# EAGLE board v3_dashbutton_2450 (EAGLE 9.1.3)
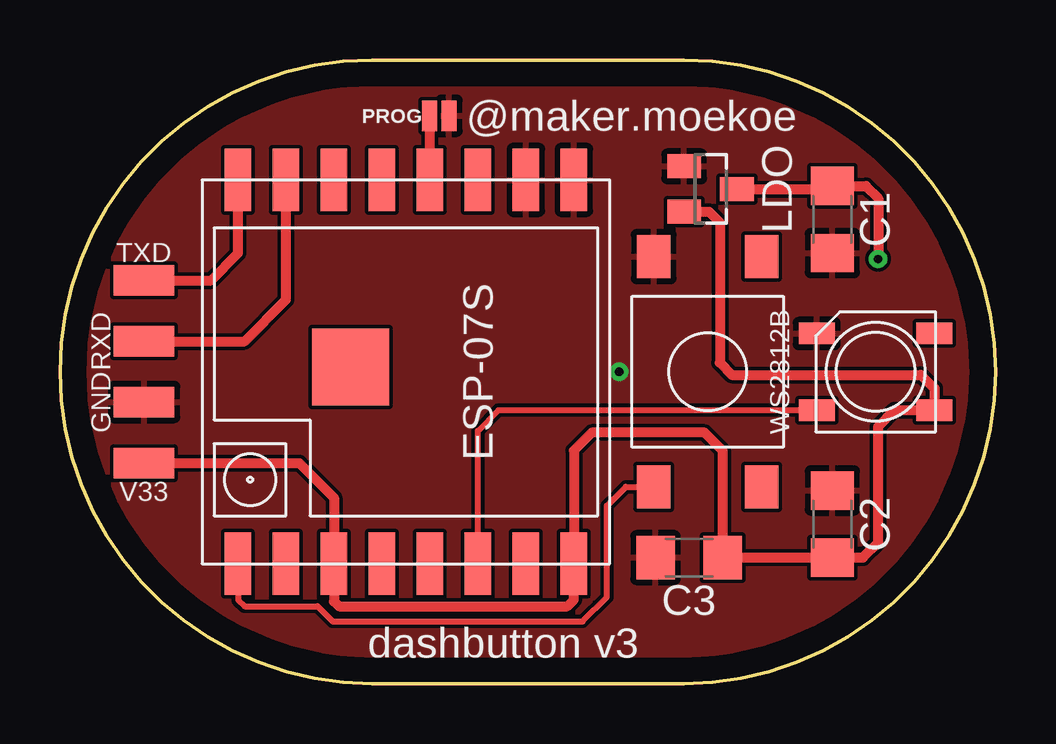
[diagram p0: board, top side]
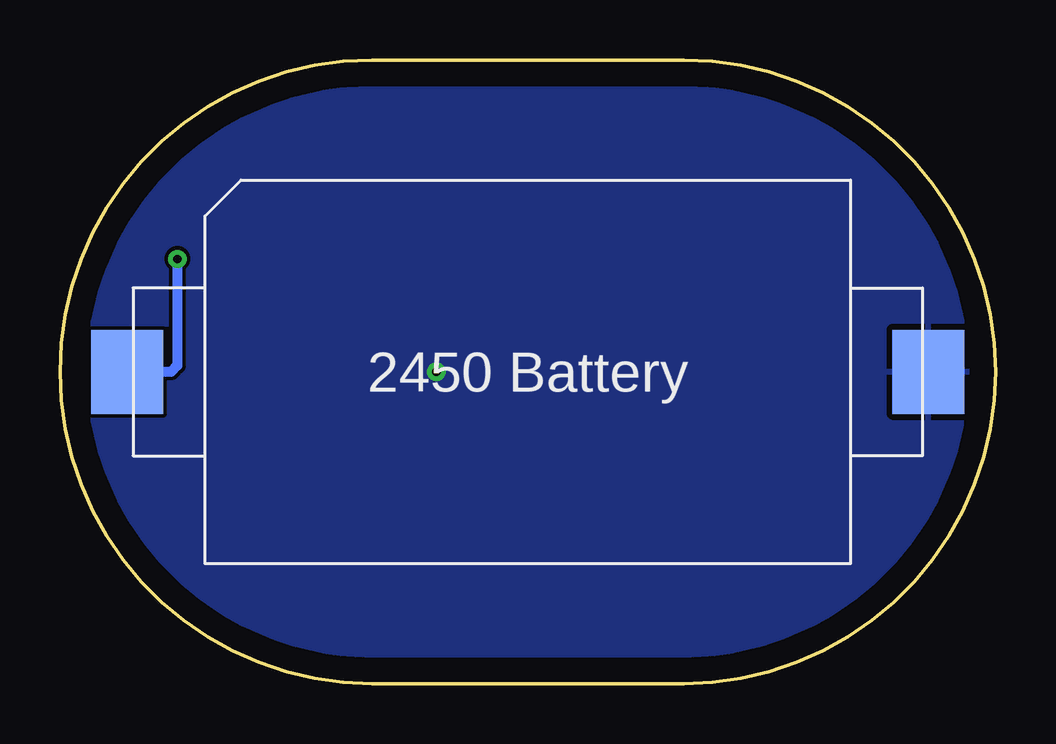
[diagram p1: board, bottom side, seen from below]

Size 39 x 26 mm. Coordinates in mm from the lower left corner, seen from the top.
Outline: 39,13 arc-90 26,0 13,0 arc-90 0,13 arc-90 13,26 26,26 arc-90 39,13
Copper layers (1*16): Top 0.035mm / dielectric 1.5mm / Bottom 0.035mm
Design rules "default": minimum track width 6mil, minimum drill 0.35mm, track to track 6mil, track to pad 6mil, pad to pad 6mil, via to via 6mil, smd to smd 6mil, copper to edge 40mil, drill to drill 6mil, minimum pad ring 10mil, minimum via ring 8mil, stop-mask expansion 4mil, vias tented up to drill 0mil, thermal gap 10mil

## Footprints (pad centres in the part's own frame; a part is rotated, then mirrored left to right if it is on the bottom)
BUTTON_OMRON_B3FS = smd 1.8 x 1.4: P$1 4.8,2.25; P$2 4.8,-2.25; P$3 -4.8,-2.25; P$4 -4.8,2.25
C1206 = smd 1.6 x 1.8: 1 -1.4,0; 2 1.4,0
SMD1,27-2,54 = smd 1.27 x 2.54: 1 0,0
SOT23 = smd 1 x 1.4: 1 -0.95,-1.1; 2 0.95,-1.1; 3 0,1.1
SMT-JUMPER_2_NO_NO-SILK = smd 0.635 x 1.27: 1 -0.406,0; 2 0.406,0
ESP8266-07S = smd 2.6 x 1.1: ADC -8,5; EN -8,3; GND 8,-7; GPIO0 8,-1; GPIO2 8,-3; GPIO4 8,1; GPIO5 8,3; GPIO12 -8,-3; GPIO13 -8,-5; GPIO14 -8,-1; GPIO15 8,-5; GPIO16 -8,1; RST -8,7; RXD 8,5; TXD 8,7; VCC -8,-7 | smd 3.2 x 3.2: GND2 0.2,2.3
2450_BATTERYHOLDER_SMD = smd 3 x 3.5: GND 16.7,0; VCC -16.7,0
WS2812B = smd 1.5 x 0.9: DIN 2.45,1.6; DOUT -2.45,-1.6; GND 2.45,-1.6; VCC -2.45,1.6

## Placement (x,y rotation side)
BUTTON  OMRON_B3FS_BUTTON  [BUTTON_OMRON_B3FS]  27,13 90 top
C1  1u  [C1206]  32.2,19.35 270 top
C2  1u  [C1206]  32.2,6.65 90 top
C3  0,1u  [C1206]  26.23,5.25 180 top
GND  [SMD1,27-2,54]  3.5,11.73 90 top
LDO  MCP1700  [SOT23]  27.12,20.62 270 top
PROG  [SMT-JUMPER_2_NO_NO-SILK]  15.82,23.67 0 top
RXD  [SMD1,27-2,54]  3.5,14.27 90 top
TXD  [SMD1,27-2,54]  3.5,16.81 90 top
U$1  ESP8266-07S  [ESP8266-07S]  14.42,13 90 top
U$2  2450_BATTERYHOLDER_SMD  [2450_BATTERYHOLDER_SMD]  19.5,13 0 bottom
U$3  WS2812B  [WS2812B]  34,13 180 top
V33  [SMD1,27-2,54]  3.5,9.19 90 top

## Library data of the parts
BUTTON U$1-U$3 = moekoe
C1-C3 = rcl; SPICEPREFIX: C
GND RXD TXD V33 = wirepad
LDO = linear
PROG = SparkFun-Jumpers

## Nets
GND: BUTTON.P$1 C1.2 C2.2 C3.2 GND.1 LDO.1 PROG.2 U$1.GND U$1.GPIO15 U$2.GND U$3.GND
GPIO0: PROG.1 U$1.GPIO0
GPIO12: U$1.GPIO12 U$3.DIN
RESET: BUTTON.P$4 U$1.RST
RXD: RXD.1 U$1.RXD
TXD: TXD.1 U$1.TXD
V33: C2.1 C3.1 LDO.2 U$1.EN U$1.VCC U$3.VCC V33.1
VCC: C1.1 LDO.3 U$2.VCC

## Tracks (layer width: path | path; a pad name or v marks a point on that pad's centre or on a via)
GND  (via drill 0.35)
  other vias: 23.31,13
  pour Top: -0.82,26.97 39.82,26.97 39.82,-0.97 -0.82,-0.97
  pour Bottom: -0.82,26.97 39.82,26.97 39.82,-0.97 -0.82,-0.97
GPIO0
  Top 0.406: PROG.1 U$1.GPIO0 arc90 U$1.GPIO0
GPIO12
  Top 0.254: U$1.GPIO12 17.42,10.54 18.28,11.4 U$3.DIN
RESET
  Top 0.254: U$1.RST 7.44,4.98 7.44,3.47 7.69,3.22 10.74,3.22 11.37,2.59 21.79,2.59 22.8,3.6 22.8,7.41 23.59,8.2 BUTTON.P$4
RXD
  Top 0.406: RXD.1 7.69,14.27 9.42,16 U$1.RXD
TXD
  Top 0.406: TXD.1 6.29,16.81 7.42,17.94 U$1.TXD
V33
  Top 0.406: V33.1 9.97,9.19 11.42,7.75 U$1.EN 11.42,3.43 11.63,3.22 21.15,3.22 21.42,3.49 U$1.VCC 21.42,9.71 22.17,10.46 26.87,10.46 27.63,9.7 C3.1 C2.1 33.47,5.25 34.11,5.89 34.11,10.71 34.79,11.4 U$3.VCC 36.45,12.31 35.88,12.87 28.01,12.87 27.5,13.38 27.5,19.22 27.05,19.67 LDO.2
VCC  (via drill 0.35)
  Top 0.406: LDO.3 32.07,20.62 C1.1 33.59,20.75 34.11,20.24 v34.11,17.7
  Bottom 0.406: v34.11,17.7 34.11,13.25 34.36,13 U$2.VCC

## Text on the board
tNames: @maker.moekoe | dashbutton v3